# Allegro board delta_sigma_dac.brd
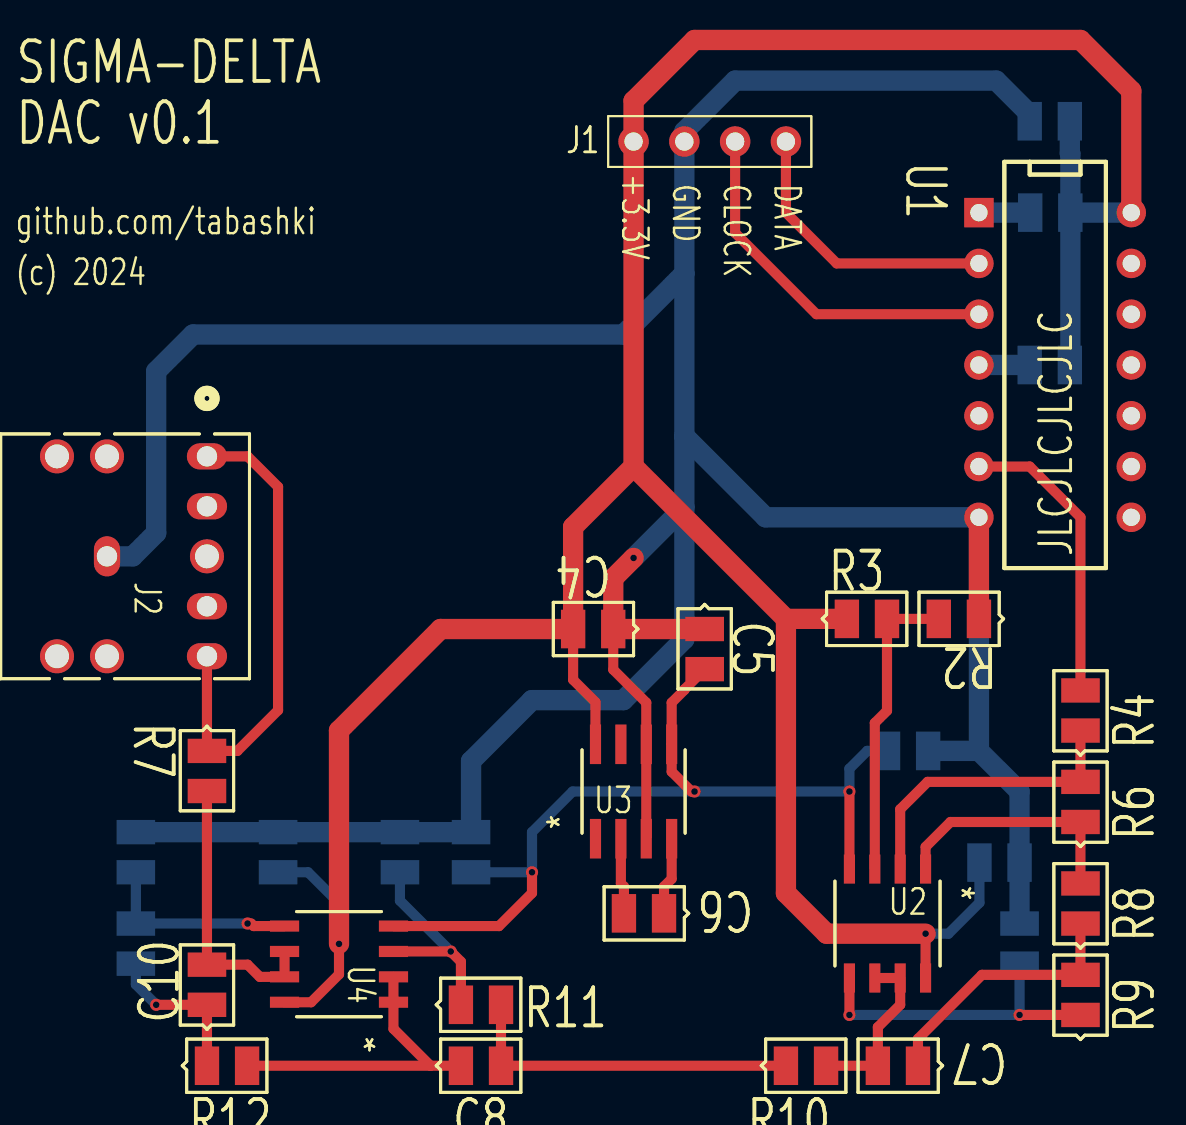
[diagram p0: board, top side]
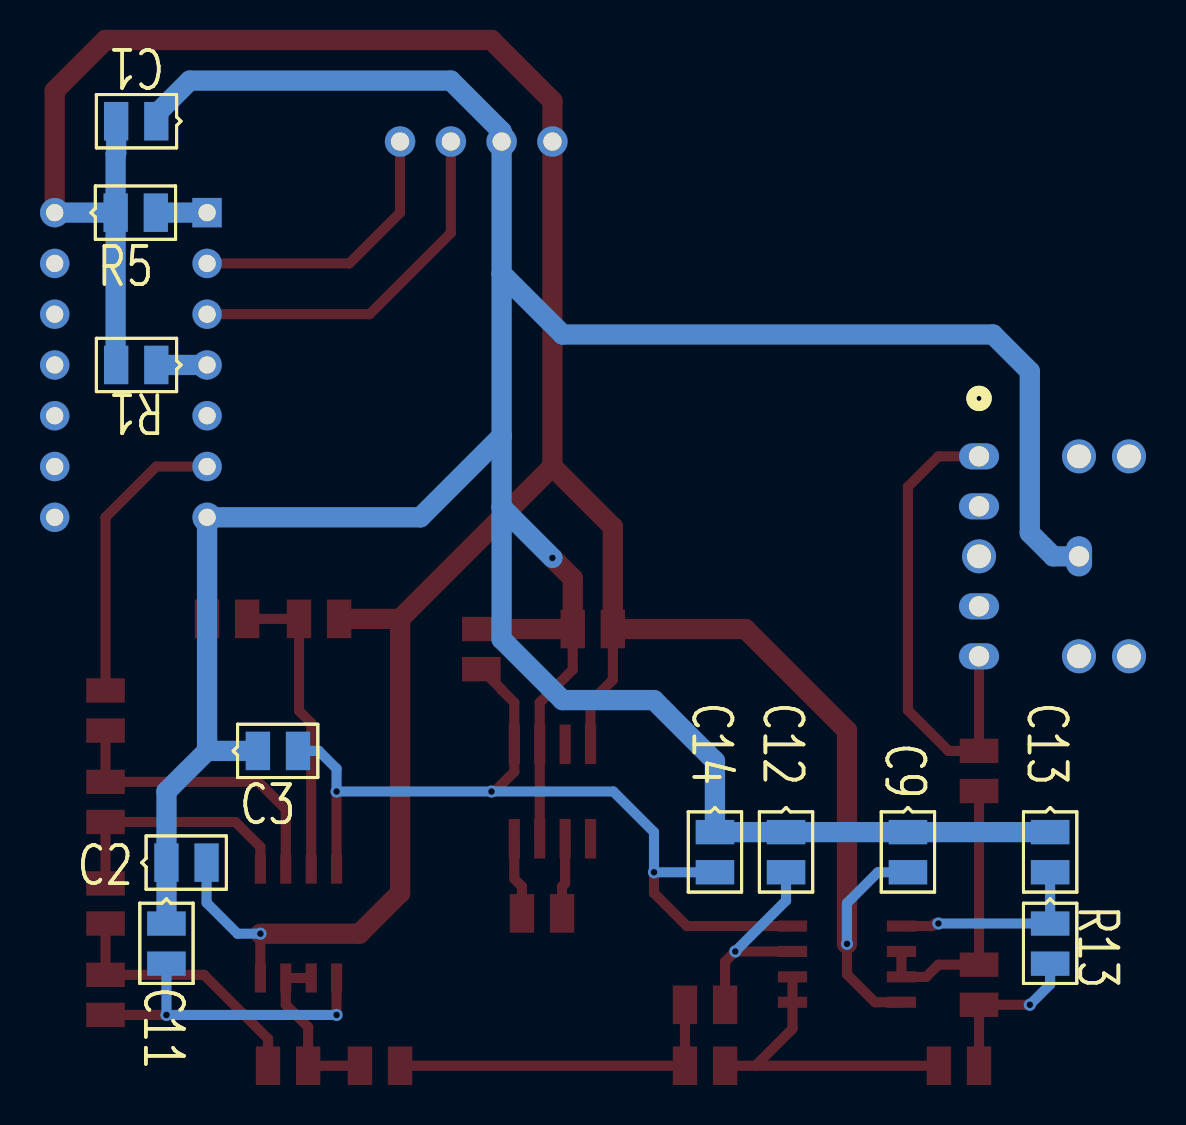
[diagram p1: board, bottom side, seen from below]

No outline. copper layers: TOP, BOTTOM. Coordinates in mm from the lowest, leftmost part position.

## Design rules (mm)
constraint set DEFAULT: min track width 0.127

## Placement (name value [footprint] x y rotation side)
C1  100n  [SMD080512]  44.7 47.24 0 bottom
C2  100n  [SMD080512]  44.2 10.16 180 bottom
C3  100n  [SMD080512]  39.62 15.75 180 bottom
C4  100n  [SMD080512]  23.88 21.84 180 top
C5  10u  [SMD080512]  28.45 21.84 270 top
C6  10u  [SMD080512]  26.42 7.62 180 top
C7  1n  [SMD080512]  39.12 0 180 top
C8  1.5n  [SMD080512]  16.26 0 0 top
C9  100n  [SMD080512]  7.11 11.68 270 bottom
C10  3.3n  [SMD080512]  3.56 3.05 90 top
C11  820p  [SMD080512]  44.2 7.11 270 bottom
C12  680p  [SMD080512]  13.21 11.68 270 bottom
C13  220p  [SMD080512]  0 11.68 270 bottom
C14  100n  [SMD080512]  16.76 11.68 270 bottom
J1  CON4  [JUMPER4]  24.89 46.23 0 top
J2  YPJ-8174X  [SJ1-3523N_CUD]  3.56 30.48 270 top
R1  10k  [SMD080512]  44.7 35.05 0 bottom
R2  1k  [SMD080512]  42.16 22.35 180 top
R3  7.5k  [SMD080512]  35.56 22.35 0 top
R4  3.3k  [SMD080512]  47.24 16.76 90 top
R5  10k  [SMD080512]  46.74 42.67 180 bottom
R6  1k  [SMD080512]  47.24 12.19 90 top
R7  100  [SMD080512]  3.56 15.75 270 top
R8  7.5k  [SMD080512]  47.24 7.11 90 top
R9  16k  [SMD080512]  47.24 2.54 90 top
R10  7.5k  [SMD080512]  32.51 0 0 top
R11  13k  [SMD080512]  16.26 3.05 0 top
R12  11k  [SMD080512]  3.56 0 0 top
R13  11k  [SMD080512]  0 7.11 270 bottom
U1  SN74HC74N  [DIP10014W300L800]  42.16 42.67 270 top
U2  LM358DR2G  [SOIC-8_ONS]  37.59 7.11 270 top
U3  TC7660COA  [SOIC8-N_MC_MCH]  24.89 13.72 90 top
U4  LM358DR2G  [SOIC-8_ONS]  10.16 5.08 180 top

## Library data of the parts
C1-C5 C7-C14 = C
C6 = C_2
J1 = CON4
J2 = PHONOJACK STEREO-R
R1-R13 = R
U1 = 74HC74_1
U2 U4 = LM358_1
U3 = TC7660COA

## Footprints (pads in the part's own frame, mm; a bottom-side part is the same pattern mirrored in y, then rotated)
DIP10014W300L800
  rect 1.473x1.473 hole 0.864: 1(0,0)
  round 1.473 hole 0.864: 2(2.54,0) 3(5.08,0) 4(7.62,0) 5(10.16,0) 6(12.7,0) 7(15.24,0) 8(15.24,7.62) 9(12.7,7.62) 10(10.16,7.62) 11(7.62,7.62) 12(5.08,7.62) 13(2.54,7.62) 14(0,7.62)
JUMPER4
  round 1.524 hole 0.914: 1(0,0) 2(2.54,0) 3(5.08,0) 4(7.62,0)
SJ1-3523N_CUD
  round 1.702 hole 1.194: (0,-5) (0,-7.5) (10,-5) (10,-7.5) 4(5,0)
  oval 2.008x1.308 hole 1.016: 1(5,-5)
  oval 1.308x2.008 hole 1.016: 2(0,0) 3(10,0) 10(2.5,0) 11(7.5,0)
SMD080512
  rect 1.219x1.93 smd: 1(0,0) 2(2.007,0)
SOIC8-N_MC_MCH
  rect 1.981x0.559 smd: 1(-2.362,1.905) 2(-2.362,0.635) 3(-2.362,-0.635) 4(-2.362,-1.905) 5(2.362,-1.905) 6(2.362,-0.635) 7(2.362,0.635) 8(2.362,1.905)
SOIC-8_ONS
  rect 1.46x0.559 smd: 1(-2.724,1.905) 2(-2.724,0.635) 3(-2.724,-0.635) 4(-2.724,-1.905) 5(2.724,-1.905) 6(2.724,-0.635) 7(2.724,0.635) 8(2.724,1.905)

## Nets
3V3: C1.2 C2.2 C4.2 C9.2 J1.1 R1.2 R3.1 R5.1 U1.14 U2.8 U3.8 U4.8
-3V3: C3.2 C5.2 C14.2 U2.4 U3.5(VOUT) U4.4
0: C1.1 C2.1 C3.1 C4.1 C5.1 C9.1 C11.1 C12.1 C13.1 C14.1 J1.2 J2.1 R2.1 U1.7 U3.3 U3.6
CLK_IN_276: J1.3 U1.3
DATA_IN_276: J1.4 U1.2
FILTER_IN: R6.1 R8.2 U2.1
FILTER_OUT: C10.2 R7.2 U4.6 U4.7(OUT)
FILTER_STAGE2_IN: C7.2 R10.2 U2.6 U2.7(OUT)
FILTER_STAGE3_IN: C8.1 R12.2 U4.1 U4.2
LINE_OUT: J2.2 J2.3 R7.1
N02546: C6.2 U3.2
N02557: C6.1 U3.4
N08840: R5.2 U1.1
N09783: R4.2 U1.6
N43071: R2.2 R3.2 U2.3
N45995: R4.1 R6.2 U2.2
N58833: C10.1 R12.1 R13.2
N58897: C13.2 R13.1 U4.5
N67358: C7.1 R8.1 R9.2
N68075: C11.2 R9.1 U2.5
N70407: C12.2 R11.1 U4.3
N83507: R1.1 U1.4
N91136: C8.2 R10.1 R11.2

Pads without a net: J2 4 10 11; U1 5 8 9 10 11 12 13; U3 1 7

## Via types
v1: diameter 0.61, hole 0.33, TOP to BOTTOM, 11 vias

## Routing (per net, layer and track width the routed paths; a pad name or vN(x,y) marks a point on that pad's centre or on a via; arc(x,y) is an arc through that point)
3V3: length 160.4
  TOP w0.508: U2.8 v1(39.5,6.6) ; v1(10.16,6.1) 10.16,4.57 8.76,3.17 U4.8 ; U3.8 22.99,18.19 21.87,19.3 C4.2
  TOP w1.016: 24.89,29.97 J1.1 24.89,48.26 27.94,51.31 47.24,51.31 49.78,48.77 U1.14 ; 24.89,29.97 32.51,22.35 ; 24.89,29.97 21.87,26.95 C4.2 15.24,21.84 10.16,16.76 v1(10.16,6.1) ; v1(39.5,6.6) 34.54,6.6 32.51,8.64 32.51,22.35 ; 32.51,22.35 R3.1
  BOTTOM w0.508: v1(39.5,6.6) 40.64,6.6 42.19,8.15 C2.2 ; v1(10.16,6.1) 10.16,8.13 8.61,9.68 C9.2
  BOTTOM w1.016: R5.1 46.74,45.62 46.71,45.64 C1.2 ; R5.1 U1.14 ; R5.1 46.74,35.08 R1.2
-3V3: length 45.1
  TOP w0.508: U4.4 18.16,6.98 19.81,8.64 v1(19.81,9.68) ; C5.2 27.43,18.82 27.43,18.8 26.8,18.16 U3.5 26.8,14.71 27.79,13.72 v1(27.94,13.72) ; v1(35.69,13.72) U2.4
  BOTTOM w0.508: C3.2 36.58,15.75 35.69,14.86 v1(35.69,13.72) v1(27.94,13.72) 21.84,13.72 19.81,11.68 v1(19.81,9.68) C14.2
0: length 186.6
  TOP w0.508: C4.1 23.88,19.81 25.53,18.16 U3.6 U3.3
  TOP w1.016: v1(24.89,25.4) 23.88,24.38 C4.1 C5.1 ; U1.7 R2.1
  BOTTOM w1.016: 42.16,15.75 U1.7 31.5,27.43 27.43,31.5 ; 42.16,15.75 44.2,13.72 C2.1 C11.1 ; 42.16,15.75 C3.1 39.62,16.1 ; 27.43,39.62 J1.2 27.43,46.74 29.97,49.28 43.03,49.28 44.7,47.6 C1.1 ; 27.43,39.62 24.38,36.58 2.86,36.58 1.02,34.74 1.02,26.65 -0.15,25.48 J2.1 ; 27.43,39.62 27.43,31.5 ; 27.43,27.94 27.43,21.34 24.38,18.29 19.81,18.29 16.76,15.24 C14.1 C12.1 C9.1 C13.1 ; 27.43,27.94 v1(24.89,25.4) ; 27.43,27.94 27.43,31.5
CLK_IN_276: length 18.4
  TOP w0.508: J1.3 29.97,41.66 34.04,37.59 U1.3
DATA_IN_276: length 14.3
  TOP w0.508: U1.2 35.05,40.13 32.51,42.67 J1.4
FILTER_IN: length 12.4
  TOP w0.508: U2.1 39.5,10.95 40.74,12.19 R6.1 R8.2
FILTER_OUT: length 14.1
  TOP w0.508: U4.6 U4.7 6.2,4.45 5.59,5.05 C10.2 R7.2
FILTER_STAGE2_IN: length 8.7
  TOP w0.508: R10.2 C7.2 37.11,1.93 38.23,3.05 U2.7 U2.6
FILTER_STAGE3_IN: length 15.9
  TOP w0.508: 14.73,0 12.88,1.85 U4.1 U4.2 ; 14.73,0 R12.2 ; 14.73,0 C8.1
LINE_OUT: length 24.5
  TOP w0.508: J2.2 5.59,30.48 7.11,28.96 7.11,17.78 5.08,15.75 R7.1 J2.3
N02546: length 3.8
  TOP w0.508: U3.2 24.26,9.12 24.41,8.97 C6.2
N02557: length 3.9
  TOP w0.508: U3.4 26.8,9.35 26.42,8.97 C6.1
N08840: length 2.6
  BOTTOM w1.016: R5.2 U1.1
N09783: length 14.8
  TOP w0.508: U1.6 44.7,29.97 47.24,27.43 R4.2
N43071: length 15.4
  TOP w0.508: U2.3 36.96,17.14 37.57,17.75 R3.2 R2.2
N45995: length 15.1
  TOP w0.508: U2.2 38.23,12.83 39.6,14.2 R6.2 R4.1
N58833: length 8.1
  TOP w0.508: R12.1 C10.1 v1(1.02,3.05)
  BOTTOM w0.508: v1(1.02,3.05) 0,4.06 R13.2
N58897: length 10.1
  TOP w0.508: U4.5 5.89,6.98 5.77,7.11 v1(5.59,7.11)
  BOTTOM w0.508: C13.2 R13.1 v1(5.59,7.11)
N67358: length 13.4
  TOP w0.508: R8.1 R9.2 42.32,4.55 39.12,1.35 C7.1
N68075: length 16
  TOP w0.508: U2.5 v1(35.69,2.54) ; R9.1 v1(44.2,2.54)
  BOTTOM w0.508: v1(35.69,2.54) v1(44.2,2.54) C11.2
N70407: length 10.8
  TOP w0.508: R11.1 16.26,5.21 v1(15.75,5.71) U4.3
  BOTTOM w0.508: v1(15.75,5.71) 13.21,8.25 C12.2
N83507: length 2.5
  BOTTOM w1.016: U1.4 R1.1
N91136: length 17.3
  TOP w0.508: R11.2 C8.2 R10.1

## Text on the board
Ref Des/Silkscreen Top: github.com/tabashki | (c) 2024 | +3.3V | GND | CLOCK | DATA | JLCJLCJLCJLC | SIGMA-DELTA | DAC v0.1
